# Altium PCB Steering_Converter_1R0.PcbDoc
Units mm, origin at the board's own origin, x right, y up, seen from the top; angles counter-clockwise.
Board outline 49.4 x 37.08 mm, 2 copper layers (Top Layer, Bottom Layer); 23 components, 24 nets, 101 pads, 15 vias.
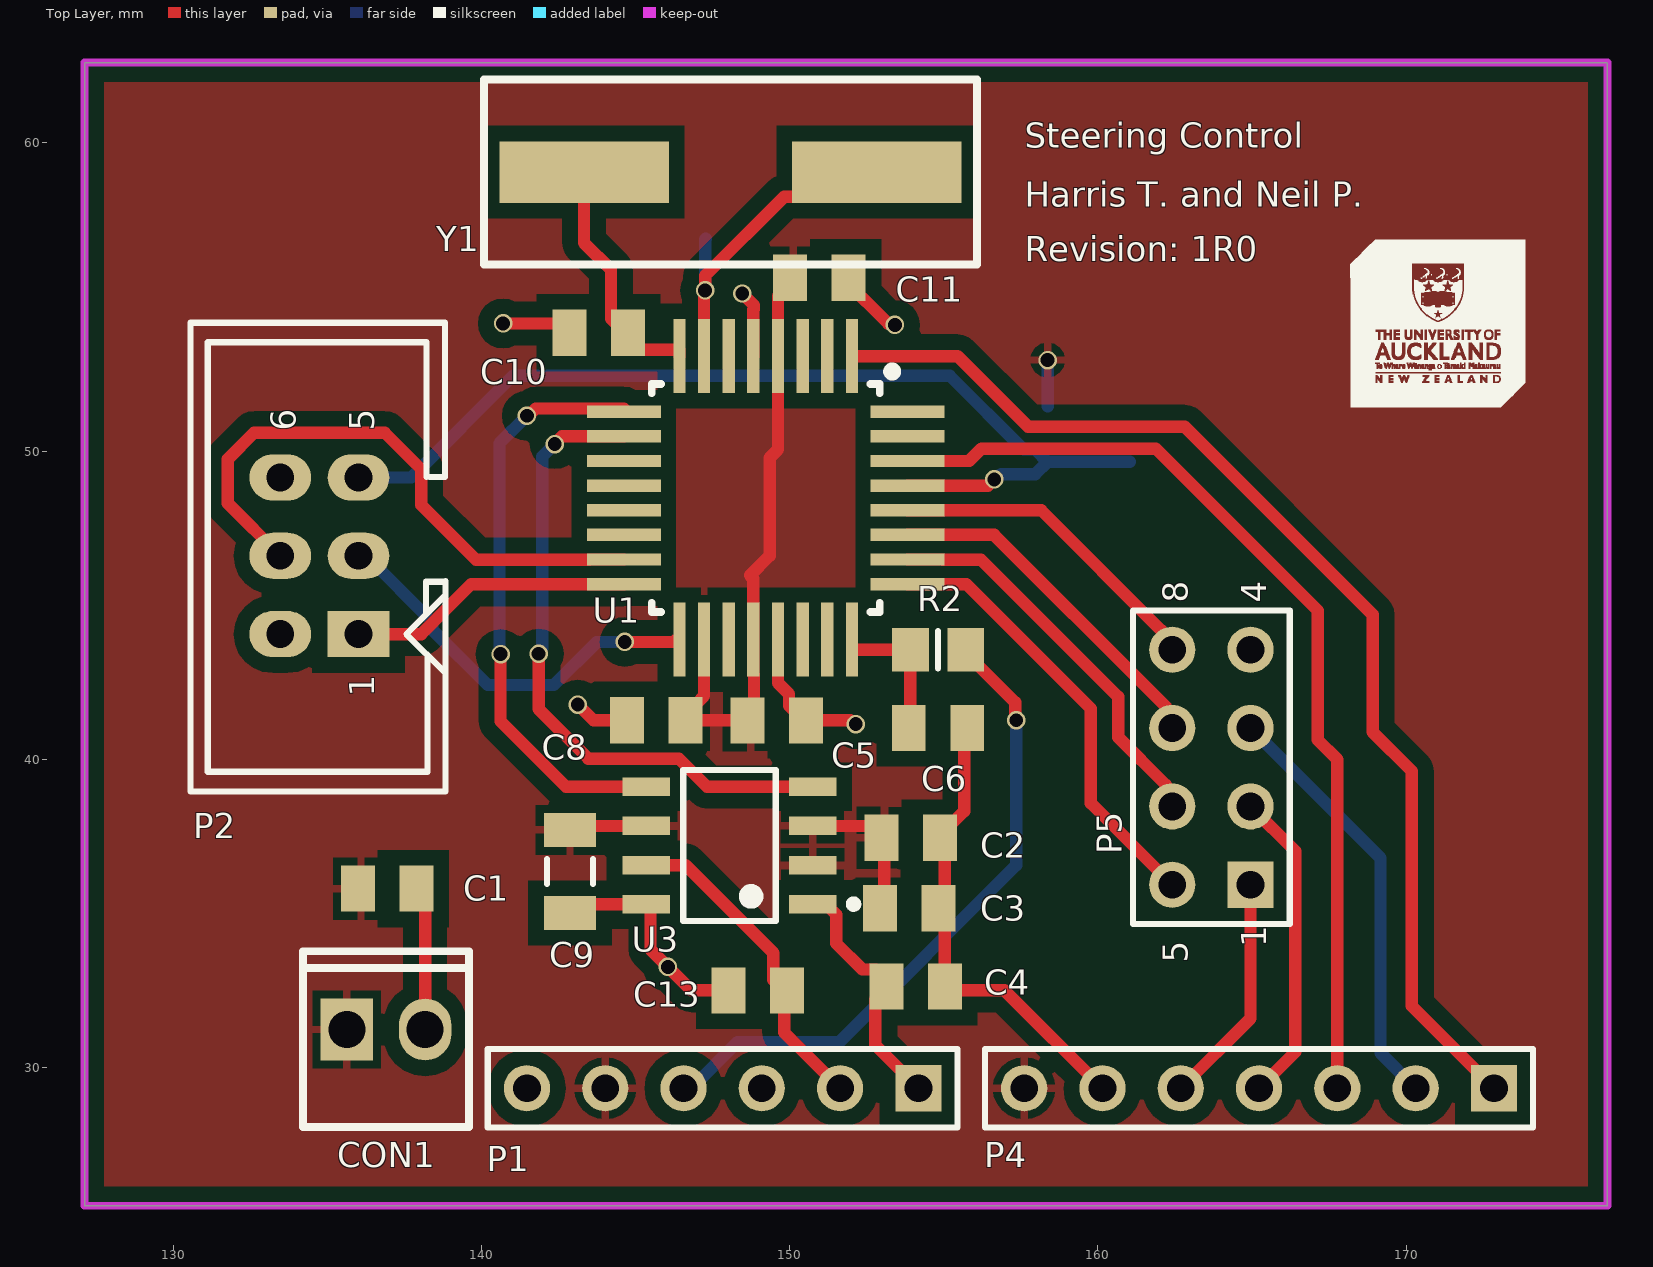
[diagram p0: Top Layer view]
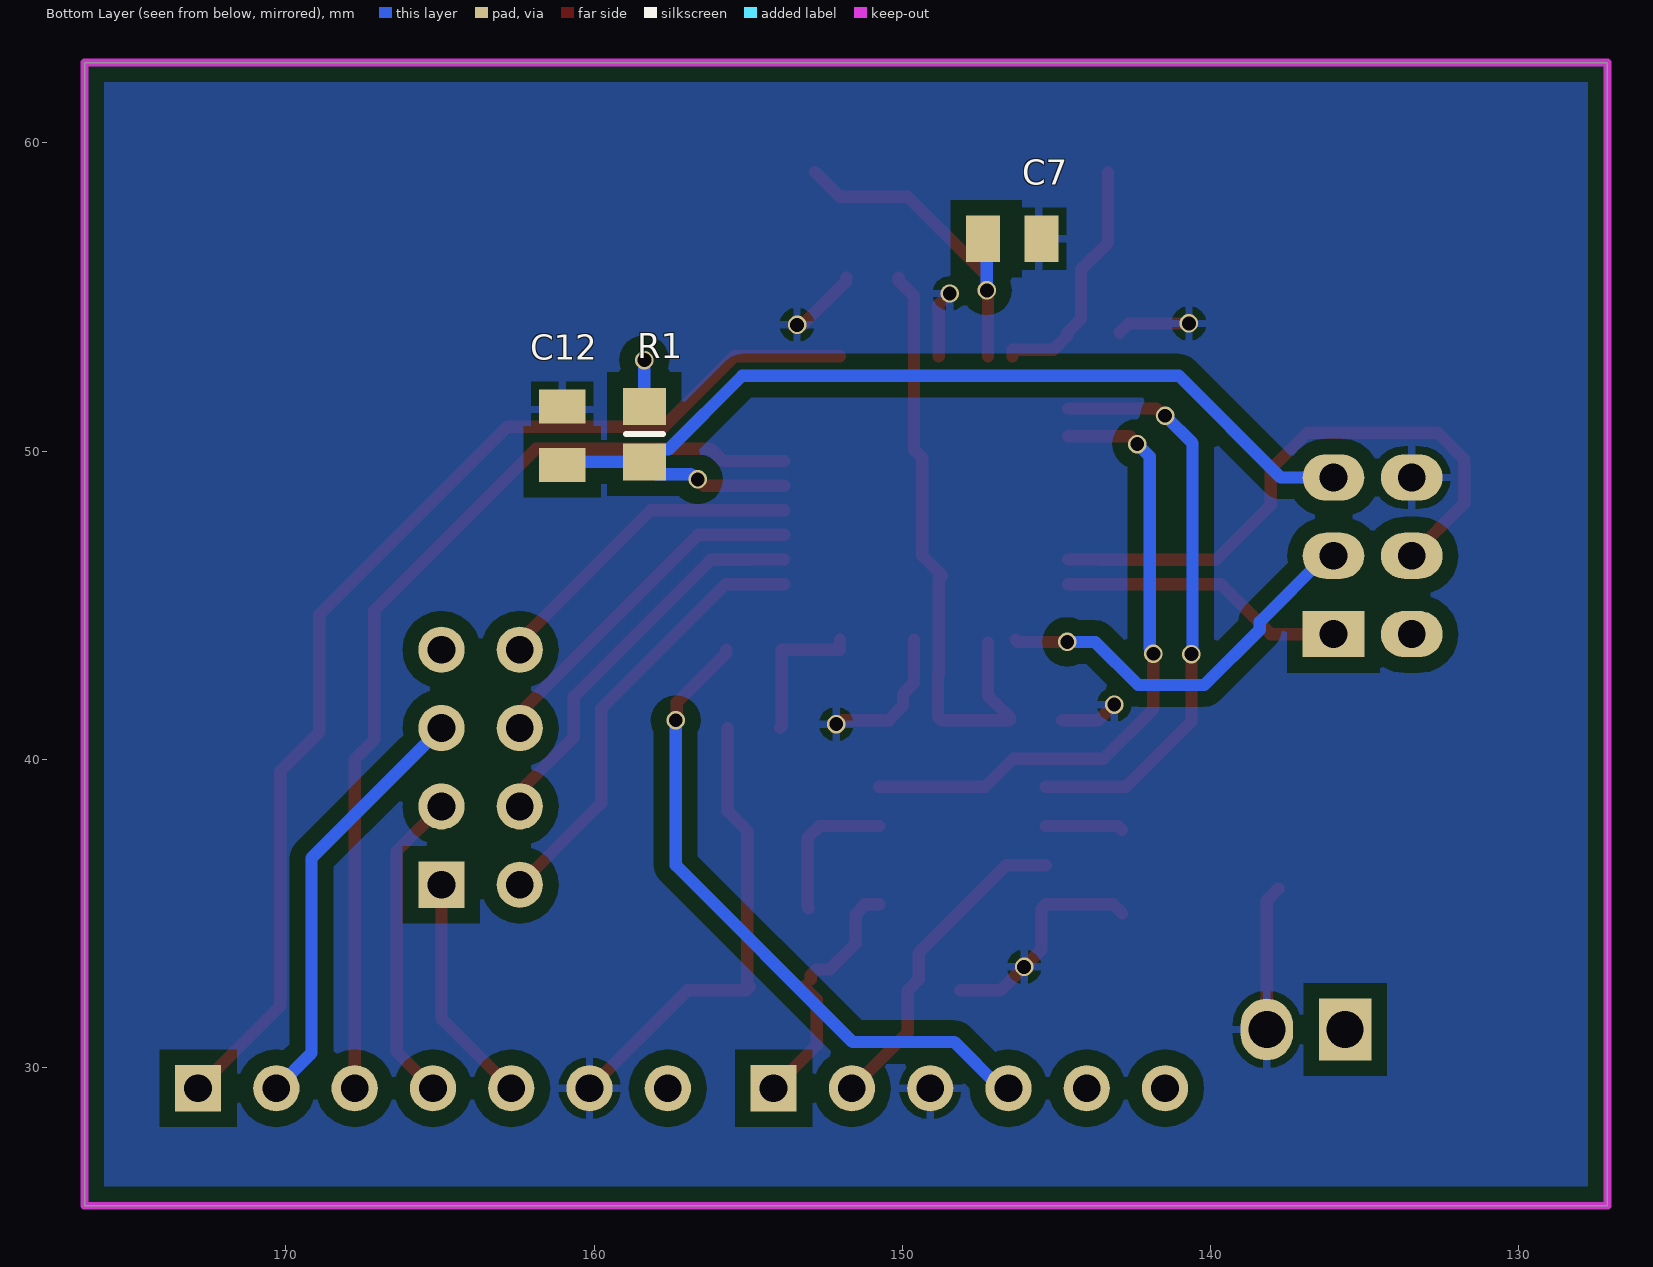
[diagram p1: Bottom Layer view, seen from below]

## Layer stack, top to bottom
Top Solder: solder mask 0.0102, Solder Resist, Dk 3.5
Top Layer: signal copper 0.0356
Dielectric 1: dielectric 0.32, FR-4, Dk 4.8
Bottom Layer: signal copper 0.0356
Bottom Solder: solder mask 0.0102, Solder Resist, Dk 3.5

## Board outline
127.127,25.527 127.127,62.611 176.53,62.611 176.53,25.527

## Design rules (kind name [scope] priority, off if disabled: settings)
Clearance [All] p1: gap=0.5 ignorepadtopadclearanceinfootprint=TRUE except(0.3: Track-Track Track-SMDPad)
MinimumSolderMaskSliver [All] p1 off: minsoldermaskwidth=0.254
PolygonConnect [All] p1: connectstyle=Relief reliefconductorwidth=0.254 reliefentries=4 polygonreliefangle="90 Angle" airgapwidth=0.254
RoutingVias [All] p1: holewidth=0.711 width=1.27 viastyle="Through Hole" minholewidth=0.711 minwidth=1.27 maxholewidth=0.711 maxwidth=1.27
SolderMaskExpansion [All] p1: expansion=0.102 istentingtop=FALSE
Width [All] p1: maxlimit=0.5 minlimit=0.4 preferedwidth=0.4
29 further rules are at their usual default settings.

## Components (designator, comment, footprint, x,y, rotation, side; value= is the part's Value field where it differs from the comment)
C1 "100n" C0805 136.945,35.814 r180 top value=?
C2 "100n" C0805 153.924,37.465 r180 top value=?
C3 "100n" C0805 153.885,35.179 r180 top value=?
C4 "100n" C0805 154.09,32.639 r180 top value=?
C5 "100n" C0805 149.58,41.27 r180 top value=?
C6 "100n" C0805 154.813,41.021 r180 top value=?
C7 "18p" C0805 146.431,56.896 r0 bottom value=?
C8 "100n" C0805 145.669,41.275 r0 top value=?
C9 "1u" C1206 142.875,36.369 r90 top value=100nF/100V
C10 "18p" C0805 143.803,53.848 r0 top value=?
C11 "100n" C0805 150.964,55.626 r180 top value=?
C12 "100n" C0805 161.036,50.507 r270 bottom value=?
C13 "100n" C0805 148.971,32.512 r0 top value=?
CON1 "Header 2X1" HDR2X1_2P54 135.636,31.242 r90 top
P1 "Header 6" HDR1X6 154.178,29.337 r180 top
P2 "HDR3X2" HDR2X3_2P54 136.017,44.069 r90 top
P4 "BLE Header" HDR1X7 172.847,29.337 r180 top
P5 "Header 4X2A" HDR2X4_CEN 164.951,35.941 r90 top
R1 "Resistor 0805" R0805 158.369,50.557 r90 bottom value=?
R2 "Resistor 0805" R0805 154.813,43.561 r180 top value=?
U1 "ATMega328PB" TQFP32 149.225,48.487 r270 top
U3 "IC_Diodes_ZXBM5210-S-13_eec" Diodes_ZXBM5210-S-13_0 148.049,37.211 r90 top
Y1 "SMT-XTAL 16MHz" HC49-US 148.082,59.055 r180 top

## Footprints (in the part's own frame and the unit in brackets; to place one, negate y for a bottom-side part, rotate by r counter-clockwise, add the part's x,y. Pads: shape width x height; smd on the part's side, far side on the other; paste and mask are expansions set on the pad)
C0805 [mm]
  rect 1.1x1.5 smd: 1(-0.95,0) 2(0.95,0)
  body extent -1.1,-0.72 1.1,0.72, height 1.1
C1206 [mm] "Chip Capacitor, Body 3.2x1.6mm, IPC High Density"
  rect 1.1x1.7 smd: 1(-1.35,0) 2(1.35,0)
  silkscreen extent -0.4,-0.75 0.4,0.75, body extent -1.6,-0.8 1.6,0.8, height 1.5
Diodes_ZXBM5210-S-13_0 [mm]
  rect 0.6x1.55 smd paste+0 mask+0: 1(-1.905,-2.7) 2(-0.635,-2.7) 3(0.635,-2.7) 4(1.905,-2.7) 5(1.905,2.7) 6(0.635,2.7) 7(-0.635,2.7) 8(-1.905,2.7)
  silkscreen extent -2.45,-4.15 2.45,1.5
HC49-US [mm] "20Mhz Crystal"
  rect 5.5x2 smd: 1(-4.75,0) 2(4.75,0)
  silkscreen extent -8,-3 8,3, body extent -4.79,-2.4 4.79,2.4, height 3.8
HDR1X6 [mm] "Connector; Header; 6 Position"
  rect 1.5x1.5 hole 0.9: 1(0,0)
  round 1.5 hole 0.9: 2(2.54,0) 3(5.08,0) 4(7.62,0) 5(10.16,0) 6(12.7,0)
  silkscreen extent -1.27,-1.27 13.97,1.27
HDR1X7 [mm] "Connector; Header; 7 Position"
  rect 1.5x1.5 hole 0.9: 1(0,0)
  round 1.5 hole 0.9: 2(2.54,0) 3(5.08,0) 4(7.62,0) 5(10.16,0) 6(12.7,0) 7(15.24,0)
  silkscreen extent -1.27,-1.27 16.51,1.27
HDR2X1_2P54 [mm] "Polarised Header 2 way"
  rect 2x1.7 hole 1.2: 1(0,0)
  oval 2x1.7 hole 1.2: 2(0,-2.54)
  silkscreen extent -3.16,-3.96 2.54,1.42, body extent -3.3,-3.64 3.17,1.44, height 9.99
HDR2X3_2P54 [mm] "IDC 3X2 Way 2.54 pitch"
  rect 1.5x2 hole 0.9: 1(0,0)
  oval 1.5x2 hole 0.9 paste+0: 2(0,2.54)
  oval 1.5x2 hole 0.9: 3(2.54,0) 4(2.54,2.54) 5(5.08,0) 6(5.08,2.54)
  silkscreen extent -5.1,-2.82 10.1,5.45, body extent -5.07,-3.17 10.17,6.28, height 9.1
HDR2X4_CEN [mm] "Connector; Header; 4x2 Position"
  rect 1.5x1.5 hole 0.9: 1(0,0)
  round 1.5 hole 0.9: 2(2.54,0) 3(5.08,0) 4(7.62,0) 5(0,2.54) 6(2.54,2.54) 7(5.08,2.54) 8(7.62,2.54)
  silkscreen extent -1.27,-1.27 8.89,3.81
R0805 [mm]
  rect 1.2x1.4 smd: 1(-0.9,0) 2(0.9,0)
  silkscreen extent 0,-0.6 0,0.6, body extent -1.07,-0.7 1.07,0.7, height 0.65
TQFP32 [mm]
  rect 2.4x0.4 smd: 1(-4.6,2.8) 2(-4.6,2) 3(-4.6,1.2) 4(-4.6,0.4) 5(-4.6,-0.4) 6(-4.6,-1.2) 7(-4.6,-2) 8(-4.6,-2.8) 17(4.6,-2.8) 18(4.6,-2) 19(4.6,-1.2) 20(4.6,-0.4) 21(4.6,0.4) 22(4.6,1.2) 23(4.6,2) 24(4.6,2.8)
  rect 0.4x2.4 smd: 9(-2.8,-4.6) 10(-2,-4.6) 11(-1.2,-4.6) 12(-0.4,-4.6) 13(0.4,-4.6) 14(1.2,-4.6) 15(2,-4.6) 16(2.8,-4.6) 25(2.8,4.6) 26(2,4.6) 27(1.2,4.6) 28(0.4,4.6) 29(-0.4,4.6) 30(-1.2,4.6) 31(-2,4.6) 32(-2.8,4.6)
  silkscreen extent -4.24,-3.7 3.7,4.24, body extent -3.5,-3.5 3.5,3.5, height 1.3

## Part data
C1 C2 C3 C4 C5 C6 C7 C8 C10 C11 C12 C13: library part CCAP0805, "CCAP0805", MPN=?, Part Description=?, Type="Surface Mount"
C9: library part "Cap CER Decoup C3216C0G2A104J160AC", "CAP CER 0.1UF 100V C0G 1206", Manufacturer="TDK Corporation", MPN=C3216C0G2A104J160AC, Supplier Part Number 1=1795799, Part Description="CAP CER 0.1UF 100V C0G 1206", Supplier 1=RSComponents, Supplier 2=Element14, Supplier 3=Digi-Key, Supplier 4=Mouser, Supplier Part Number 2=2906828, Supplier Part Number 3=445-172677-1-ND, Supplier Part Number 4=810-C3216C0G2A104J6C, Type="Surface mount"
CON1: library part HDR2X1
P1: "Header, 6-Pin", LatestRevisionDate=17-Jul-2002, LatestRevisionNote="Re-released for DXP Platform.", Publisher="Altium Limited"
P2: "Header, 3-Pin, Dual row"
P4: library part "Header 7", "Header, 7-Pin", LatestRevisionDate=17-Jul-2002, LatestRevisionNote="Re-released for DXP Platform.", Publisher="Altium Limited"
P5: "Header, 4-Pin, Dual row", LatestRevisionDate=17-Jul-2002, LatestRevisionNote="Re-released for DXP Platform.", Publisher="Altium Limited"
R1 R2: library part RES0805, "RES0805", MPN=?, Part Description=?, Type="Surface Mount"
U1: "IC MCU 8BIT 32KB FLASH 32TQFP", Supplier Part Number 1=ATMEGA328PB-AU-ND, Supplier 1=Digi-Key, Supplier 2=Digikey, Supplier Part Number 2=ATMEGA328PB-AU-ND
U3: "IC MOTOR DRIVER PWM 8SOIC", Digikey Part Number=ZXBM5210-S-13DICT-ND, Manufacturer=Diodes, Mouser Part Number=621-ZXBM5210-S-13, Package=SO-8, Part Number=ZXBM5210-S-13, Temperature="-40°C to +85°C", Temperature Range High=+85°C, Temperature Range Low=-40°C, Voltage=18V, ComponentLink1Description=Upverter, ComponentLink1URL=https://upverter.com/upn/revision/7a867377f73a3c32/, ComponentLink2Description=Datasheet, ComponentLink2URL=https://www.diodes.com/assets/Datasheets/ZXBM5210.pdf, Digikey Description="IC MOTOR DRIVER PWM 8SOIC", helpURL=https://upverter.com/upn/revision/7a867377f73a3c32/, Lead Free=yes, Price=0.759009212461, RoHS=TRUE, Supplier 1=Digi-Key, Supplier 2=Mouser, Supplier Part Number 1=ZXBM5210-S-13DICT-ND, Supplier Part Number 2=621-ZXBM5210-S-13
Y1: library part TXC9C-16_XTAL_SMT, "9C-16.000MAAJ-T crystal 16.0000MHZ 18PF SMD", Frequency Stability=±30ppm, Load Capacitance=18pF, Manufacturer="TXC CORPORATION", Manufacturer Part Number=9C-16.000MAAJ-T, Operating Mode=Fundamental, Operating Temperature="-20°C ~ 70°C", Package / Case=HC-49/US, Ratings=-, Supplier Part Number 1=887-1059-1-ND, Category="Crystals, Oscillators, Resonators", ComponentLink1Description=http://www.txccorp.com/download/products/quartz_crystals/2015TXC_9C_32.pdf, ComponentLink1URL=http://www.txccorp.com/download/products/quartz_crystals/2015TXC_9C_32.pdf, Frequency Tolerance=±30ppm, Height - Seated (Max)="0.161\" (4.10mm)", Mounting Type="Surface Mount", Packaging="Cut Tape (CT)", Part Status=Active, Pricing 1="1=0.75, 10=0.628, 50=0.5656, 100=0.5026, 500=0.47744 (NZD)", RoHS="RoHS Compliant", Size / Dimension="0.449\" L x 0.189\" W (11.40mm x 4.80mm)", Stock 1=11514, Supplier 1=Digi-Key, Type="MHz Crystal"

## Via types
v1: diameter 0.6, hole 0.45, Top Layer to Bottom Layer, 15 vias

## Nets (pads, with @x,y where several pads share a name; then routed paths per layer and width w, separated by ;. In a path a pad name is that pad's centre, name@x,y a point inside that pad or via, vN(x,y) a via of type N, cw(c..) or ccw(c..) an arc to the next point about the centre after c; other vN are vias at no path point)
3V3: C1.2 C2.2 C3.2 C5.2 C8.2 C9.2 C11.2 CON1.1 P1.5 P4.7 R1.2 U1.4 U1.18 U1.20 U3.2 U3.3 U3.6 | length 28.9
  Top Layer w0.4: C9.2 143.002,37.846 U3.6 ; U1.18@147.225,43.787 147.225,42.059 146.991,41.825 146.969,41.825 146.519,41.375 146.519,41.275 148.725,41.275 148.73,41.27 148.844,41.384 148.844,42.751 148.825,42.77 U1.20 148.825,45.866 148.717,45.974 149.352,46.609 149.352,49.784 149.625,50.057 U1.4 149.625,55.037 150.114,55.526 C11.2@150.114,55.626 ; U3.3 152.693,37.846 153.074,37.465 153.074,35.218 C3.2@153.035,35.179
  Bottom Layer w0.4: R1.2 v1(158.369,52.959)
5V: P2.2
BLE_RST: P4.1 U1.1 | length 37.4
  Top Layer w0.4: U1.1 155.447,53.087 157.734,50.8 162.814,50.8 168.91,44.704 168.91,40.894 170.18,39.624 170.18,32.004 P4.1
CTS_0: P4.4 P5.2 | length 10.8
  Top Layer w0.4: P5.2 166.401,37.031 166.401,30.511 P4.4 P4.4@165.036,29.527 ; P5.2@165.142,38.672 P5.2@165.332,38.862
DRT: P5.7 U1.27 | length 11.5
  Top Layer w0.4: U1.27 156.635,47.287 161.811,42.111 162.201,41.721 162.201,41.231 P5.7
GND: C1.1 C2.1 C3.1 C4.1 C5.1 C6.1 C7.1 C8.1 C9.1 C10.1 C11.1 C12.1 C13.1 CON1.2 P1.3 P2.6 P4.6 U1.5 U1.21 U3.8 | length 40.6
  Top Layer w0.4: C1.1@137.795,35.814 138.176,35.433 CON1.2 ; v1(140.703,54.145) 142.656,54.145 C10.1@142.953,53.848 ; C9.1 143.162,35.306 U3.8 ; v1(143.129,41.783) 143.637,41.275 C8.1@144.819,41.275 ; U3.8@145.485,35.179 145.485,33.839 v1(146.05,33.274) 146.812,32.512 C13.1@148.121,32.512 ; v1(148.463,55.118) 148.844,54.737 148.844,54.61 148.825,54.591 U1.5 ; U1.21 149.625,42.482 149.98,42.127 149.98,41.75 C5.1@150.455,41.275 ; C5.1@150.43,41.27 150.435,41.275 C5.1@150.455,41.275 ; C11.1@151.814,55.626 151.814,55.526 153.2,54.14 153.378,54.14 v1(153.416,54.102) ; v1(152.146,41.148) 152.092,41.148 151.965,41.275 C5.1@150.455,41.275 ; C6.1@155.663,41.021 155.663,38.327 155.028,37.692 155.028,32.727 154.94,32.639 155.067,32.512 156.972,32.512 P4.6
IN1: U1.10 U3.4 | length 21.1
  Top Layer w0.4: v1(141.859,43.434) 141.859,41.639 143.473,40.025 146.411,40.025 147.32,39.116 U3.4 ; v1(142.38,50.236) 142.38,50.253 142.614,50.487 U1.10
  Bottom Layer w0.4: v1@141.951,43.444 141.897,43.498 141.897,43.526 141.976,43.605 141.976,49.828 142.38,50.232 v1(142.38,50.236)
IN2: U1.9 U3.5 | length 19.1
  Top Layer w0.4: v1(140.622,43.418) 140.622,41.242 142.748,39.116 U3.5 ; v1(141.478,51.154) 141.532,51.154 141.765,51.387 U1.9@144.625,51.387
  Bottom Layer w0.4: v1(140.622,43.418) 140.589,43.451 140.589,50.265 v1(141.478,51.154)
MISO: P2.1 U1.16 | length 9.3
  Top Layer w0.4: P2.1 138.049,44.069 139.667,45.687 U1.16
MOSI: P2.4 U1.15 | length 19.4
  Top Layer w0.4: P2.4 131.777,48.309 131.777,49.75 132.626,50.599 136.868,50.599 138.049,49.418 138.049,48.26 139.827,46.482 143.503,46.482 143.508,46.487 U1.15
OUT1: C4.2 P1.1 U3.1 | length 8
  Top Layer w0.4: U3.1 151.224,35.306 151.324,35.206 151.324,35.159 151.511,34.972 151.511,34.036 152.358,33.189 152.79,33.189 152.976,33.003 C4.2@152.976,32.864 ; C4.2@153.201,32.639 152.781,32.219 152.781,30.734 P1.1
OUT2: C13.2 P1.2 U3.7 | length 10.6
  Top Layer w0.4: U3.7 146.622,36.576 149.471,33.727 149.471,32.862 149.821,32.512 149.821,31.154 P1.2
RST: C12.2 P2.5 R1.1 U1.29 | length 32.4
  Top Layer w0.4: U1.29 156.436,48.887 v1(156.636,49.087)
  Bottom Layer w0.4: P2.5 137.73,49.149 141.032,52.451 155.194,52.451 157.588,50.057 157.969,50.057 R1.1 ; v1(156.636,49.087) 156.69,49.087 156.86,49.257 157.969,49.257 R1.1 ; C12.2@161.036,49.657 R1.1
RTS_0: P4.5 P5.1 | length 7.8
  Top Layer w0.4: P4.5@162.687,29.635 P4.5 164.951,31.601 P5.1
RX_0: P4.2 P5.3 | length 14.1
  Top Layer w0.4: P5.3 P5.3@165.1,41.021
  Bottom Layer w0.4: P5.3 165.869,40.103 169.164,36.808 169.164,30.48 P4.2
SCK: P2.3 U1.17 | length 12.7
  Top Layer w0.4: v1(144.653,43.815) 146.253,43.815 U1.17@146.325,43.887
  Bottom Layer w0.4: P2.3 136.267,46.609 138.405,44.471 138.405,44.221 140.208,42.418 142.35,42.418 143.747,43.815 v1@144.526,43.815
SPD_1: P5.5 U1.25 | length 14.4
  Top Layer w0.4: U1.25 155.732,45.687 159.766,41.653 159.766,38.586 P5.5
SPD_2: P5.6 U1.26 | length 13
  Top Layer w0.4: U1.26 154.942,46.487 154.947,46.482 156.21,46.482 160.655,42.037 160.655,40.727 162.201,39.181 162.201,38.691 P5.6
ST_INT: P5.8 U1.28 | length 9.8
  Top Layer w0.4: U1.28 158.161,48.087 P5.8@162.052,44.196
TX_0: P4.3 U1.30 | length 31.4
  Top Layer w0.4: U1.30 155.822,49.687 156.222,50.087 161.876,50.087 167.132,44.831 167.132,40.64 167.132,40.637 167.767,40.002 P4.3
VSTR_IN: P1.4 R2.1 | length 21.5
  Top Layer w0.4: R2.1 155.713,43.461 157.315,41.859 157.315,41.313 v1(157.353,41.275)
  Bottom Layer w0.4: P1.4@146.812,29.337 148.312,30.837 151.614,30.837 157.353,36.576 v1(157.353,41.275)
  Bottom Layer w0.5: P1.4 P1.4@146.812,29.337
VSTR_OUT: C6.2 R2.2 U1.24 | length 4.8
  Top Layer w0.4: U1.24 152.025,43.561 R2.2 153.913,41.071 C6.2@153.963,41.021
X1: C7.2 U1.7 Y1.1 | length 11.2
  Top Layer w0.4: U1.7 v1@147.225,55.198 ; v1(147.26,55.217) 147.26,55.693 149.828,58.261 152.038,58.261 Y1.1
  Bottom Layer w0.4: v1(147.26,55.217) 147.26,56.875 C7.2@147.281,56.896
X2: C10.2 U1.8 Y1.2 | length 8
  Top Layer w0.4: Y1.2 143.332,56.762 144.203,55.891 144.203,54.298 144.653,53.848 144.653,53.748 145.103,53.298 146.425,53.298 U1.8
pads on no net: P1.6 P5.4 U1.2 U1.3 U1.6 U1.11 U1.12 U1.13 U1.14 U1.19 U1.22 U1.23 U1.31 U1.32

## Polygon pours and split planes (outlines as drawn)
no net on Top Overlay (solid): 127.127,62.611 176.53,62.611
3V3 on Top Layer "3V3_L01_P000" (solid, remove dead copper, pour order 0): 127.127,62.611 176.53,62.611 176.53,25.527 127.127,25.527
GND on Bottom Layer "GND_L02_P001" (solid, pour order 1): 127.127,62.611 176.53,62.611 176.53,25.527 127.127,25.527

## Keep-outs
Keep-Out Layer:
  lines w0.254: 127.127,25.527 176.53,25.527 176.53,26.924 176.53,62.611 127.127,62.611 127.127,25.527

## Silkscreen, mask and mechanical layers (free items; w line width, h text height)
Top Overlay:
  drawing of 24 lines, arcs and shapes, not listed
  text "Steering Control" at 157.63,59.853 h0.8
  text "Harris T. and Neil P." at 157.63,57.935 h0.8
  text "Revision: 1R0" at 157.63,56.157 h0.8

## Text inside footprints (layer, text, board x,y; h text height)
P2: Top Overlay "1" at 136.525,42.037 h0.8 r90; Top Overlay "5" at 136.525,50.673 h0.8 r90; Top Overlay "6" at 133.985,50.673 h0.8 r90
P5: Top Overlay "8" at 162.919,45.085 h0.8 r90; Top Overlay "4" at 165.459,45.085 h0.8 r90; Top Overlay "1" at 165.459,33.909 h0.8 r90; Top Overlay "5" at 162.919,33.401 h0.8 r90